# EAGLE board CT_schematic (EAGLE 7.6.0)

Size 100 x 80 mm. Coordinates in mm from the lower left corner, seen from the top.
Outline: 0,0 100,0 100,80 0,80 0,0
Copper layers (1*16): Top 0.035mm / dielectric 1.5mm / Bottom 0.035mm
Design rules "default": minimum track width 10mil, minimum drill 24mil, track to track 8mil, track to pad 8mil, pad to pad 8mil, via to via 8mil, smd to smd 8mil, copper to edge 40mil, drill to drill 8mil, minimum pad ring 10mil, minimum via ring 8mil, stop-mask expansion 4mil, vias tented up to drill 0mil, thermal gap 10mil

## Footprints (pad centres in the part's own frame; a part is rotated, then mirrored left to right if it is on the bottom)
C0603 = smd 0.8 x 0.8: 1 -0.762,0; 2 0.762,0
C0402 = smd 0.5 x 0.5: 1 -0.508,0; 2 0.508,0
C0805 = smd 1.2 x 1.3: 1 -1.016,0; 2 1.016,0
EXV-9B = smd 2.718 x 1.778: 1 -2.108,0; 2 2.108,0
C1210 = smd 1.2 x 2.5: 1 -1.524,0; 2 1.524,0
R0603 = smd 0.8 x 0.8: 1 -0.762,0; 2 0.762,0
EXV-9H = smd 3.505 x 1.676: 1 -2.857,0; 2 2.857,0
L0603 = smd 0.8 x 0.8: 1 -0.762,0; 2 0.762,0
IND25X25CZ = smd 2.489 x 3.429: 1 -2.718,0; 2 2.718,0
PJ-037B_PACKAGE = drill 3.7 square: 1 12,0 | drill 3.2 square: 2 6,0
UFQFPN48 = smd 0.559 x 0.305: 1 -3.375,2.751; 2 -3.375,2.251; 3 -3.375,1.75; 4 -3.375,1.25; 5 -3.375,0.75; 6 -3.375,0.25; 7 -3.375,-0.25; 8 -3.375,-0.75; 9 -3.375,-1.25; 10 -3.375,-1.75; 11 -3.375,-2.251; 12 -3.375,-2.751; 25 3.375,-2.751; 26 3.375,-2.251; 27 3.375,-1.75; 28 3.375,-1.25; 29 3.375,-0.75; 30 3.375,-0.25; 31 3.375,0.25; 32 3.375,0.75; 33 3.375,1.25; 34 3.375,1.75; 35 3.375,2.251; 36 3.375,2.751 | smd 0.305 x 0.559: 13 -2.751,-3.375; 14 -2.251,-3.375; 15 -1.75,-3.375; 16 -1.25,-3.375; 17 -0.75,-3.375; 18 -0.25,-3.375; 19 0.25,-3.375; 20 0.75,-3.375; 21 1.25,-3.375; 22 1.75,-3.375; 23 2.251,-3.375; 24 2.751,-3.375; 37 2.751,3.375; 38 2.251,3.375; 39 1.75,3.375; 40 1.25,3.375; 41 0.75,3.375; 42 0.25,3.375; 43 -0.25,3.375; 44 -0.75,3.375; 45 -1.25,3.375; 46 -1.75,3.375; 47 -2.251,3.375; 48 -2.751,3.375 | smd 5.588 x 5.588: 49 0,0
SOT-23-6 = smd 1.1 x 0.6: 1 -1.4,0.95; 2 -1.4,0; 3 -1.4,-0.95; 4 1.4,-0.95; 5 1.4,0; 6 1.4,0.95
SAMTEC_FTSH-105-01-L-DV-K = smd 0.762 x 2.794: 1 -2.54,-2.032; 2 -2.54,2.032; 3 -1.27,-2.032; 4 -1.27,2.032; 5 0,-2.032; 6 0,2.032; 7 1.27,-2.032; 8 1.27,2.032; 9 2.54,-2.032; 10 2.54,2.032
SOIC-8 = smd 1.6 x 0.6: 1 -2.7,1.905 | smd 1.55 x 0.6: 2 -2.7,0.635; 3 -2.7,-0.635; 4 -2.7,-1.905; 5 2.7,-1.905; 6 2.7,-0.635; 7 2.7,0.635; 8 2.7,1.905
182-009-MALE = drill 1.194 pad 1.524 octagon: 1 -5.537,10.923; 2 -2.769,10.923; 3 0,10.923; 4 2.769,10.923; 5 5.537,10.923; 6 -4.153,8.08; 7 -1.384,8.08; 8 1.384,8.08; 9 4.153,8.08 | hole 3.048: -12.446,9.501; 12.446,9.501
USB-A-H = drill 0.914: 1 2.718,3.493; 2 2.718,1.003; 3 2.718,-1.003; 4 2.718,-3.493 | drill 2.311: 5 0,-6.566; 6 0,6.566
SOT143B = smd 1 x 0.7: 1 -0.75,-1 | smd 0.6 x 0.7: 2 0.95,-1; 3 0.95,1; 4 -0.95,1
XB24CZ7UIS-004 = smd 2.84 x 1.52: 1 -10,6; 2 -10,4; 3 -10,2; 4 -10,0; 5 -10,-2; 6 -10,-4; 7 -10,-6; 8 -10,-8; 9 -10,-10; 10 -10,-12; 11 -10,-14; 12 -10,-16; 13 -10,-18; 21 10,-18; 22 10,-16; 23 10,-14; 24 10,-12; 25 10,-10; 26 10,-8; 27 10,-6; 28 10,-4; 29 10,-2; 30 10,0; 31 10,2; 32 10,4; 33 10,6; 34 10,8; 35 10,10; 36 10,12; 37 10,14 | smd 1.52 x 2.84: 14 -6,-19.68; 15 -4,-19.68; 16 -2,-19.68; 17 0,-19.68; 18 2,-19.68; 19 4,-19.68; 20 6,-19.68
ABS07-32.768KHZ-7-T = smd 1.1 x 2.4: 1 -2.5,0; 2 0,0
ASFL1 = smd 1.7 x 1.5: 1 -1.27,-1.1; 2 1.27,-1.1; 3 1.27,1.1; 4 -1.27,1.1
LP2954 = smd 1.6 x 0.6: 1 -2.475,1.905 | smd 1.55 x 0.6: 2 -2.475,0.635; 3 -2.475,-0.635; 4 -2.475,-1.905; 5 2.475,-1.905; 6 2.475,-0.635; 7 2.475,0.635; 8 2.475,1.905
IR3899MTR1PBF = smd 0.25 x 0.75: 1 0,0; 2 0.5,0; 3 1,0; 4 1.5,0; 5 2,0; 6 2.5,0; 7 3,0 | smd 0.75 x 0.25: 8 3.425,0.78; 9 3.425,1.28; 10 3.425,1.78; 14 -0.425,1.78; 15 -0.425,1.28; 16 -0.425,0.78 | smd 0.3 x 1.95: 11 3.22,3.63 | smd 1.62 x 2.42: 12 1.786,3.8 | smd 1 x 1.95: 13 0.117,3.63 | smd 2.19 x 1.25: 17 1.51,1.26
SON-6 = smd 0.55 x 0.3: 1 -0.355,0.5 | smd 0.52 x 0.3: 2 -0.37,0; 3 -0.37,-0.5; 4 0.37,-0.5; 5 0.37,0; 6 0.37,0.5
SW_4-1437565-2 = smd 1.4 x 2.1: 1 -2.23,4.55; 2 -2.23,-4.55; 3 2.23,4.55; 4 2.23,-4.55
LGM67K-G1J2-24-Z = smd 0.8 x 1.4: A -2,0; C 0,0
NC7SZ125M5X = smd 1.3 x 0.7: 1 -1.3,0.95; 2 -1.3,0; 3 -1.3,-0.95; 4 1.3,-0.95; 5 1.3,0.95

## Placement (x,y rotation side)
C1  1e-06  [C0603]  -34.29,107.95 0 top  (outside the outline)
C2  1e-07  [C0603]  -38.1,107.95 0 top  (outside the outline)
C3  1e-07  [C0603]  -41.91,107.95 0 top  (outside the outline)
C4  1e-07  [C0603]  -45.72,107.95 0 top  (outside the outline)
C5  1e-07  [C0603]  -49.53,107.95 0 top  (outside the outline)
C6  1e-07  [C0603]  -53.34,107.95 0 top  (outside the outline)
C7  4.7e-06  [C0603]  -19.05,107.95 0 top  (outside the outline)
C8  2.2e-06  [C0603]  -22.86,107.95 0 top  (outside the outline)
C9  1e-08  [C0603]  -57.15,107.95 0 top  (outside the outline)
C10  1e-06  [C0603]  -60.96,107.95 0 top  (outside the outline)
C11  1e-11  [C0402]  -46.99,113.03 0 top  (outside the outline)
C12  1e-11  [C0402]  -50.8,113.03 0 top  (outside the outline)
C13  1e-07  [C0402]  -54.61,113.03 0 top  (outside the outline)
C14  1e-06  [C0603]  -64.77,107.95 0 top  (outside the outline)
C15  1e-06  [C0603]  -68.58,107.95 0 top  (outside the outline)
C16  1e-07  [C0402]  -58.42,113.03 0 top  (outside the outline)
C17  1e-05  [C0805]  -34.29,96.52 0 top  (outside the outline)
C18  1e-07  [C0402]  -62.23,113.03 0 top  (outside the outline)
C19  4.7e-11  [C0402]  -43.18,113.03 0 top  (outside the outline)
C20  8.2e-12  [C0603]  -26.67,107.95 0 top  (outside the outline)
C21  1e-08  [C0402]  -66.04,113.03 0 top  (outside the outline)
C22  1e-06  [EXV-9B]  -74.93,88.9 0 top  (outside the outline)
C23  2.2e-06  [EXV-9B]  -83.82,88.9 0 top  (outside the outline)
C24  0.0001  [C1210]  -67.31,88.9 0 top  (outside the outline)
C25  2.2e-06  [C0603]  -30.48,107.95 0 top  (outside the outline)
C26  1e-07  [C0402]  -69.85,113.03 0 top  (outside the outline)
C27  1e-07  [C0402]  -73.66,113.03 0 top  (outside the outline)
C28  8.6971073877236e-09  [R0603]  -44.45,96.52 0 top  (outside the outline)
C29  2.9649229730876e-07  [R0603]  -54.61,96.52 0 top  (outside the outline)
C32  1e-07  [C0402]  -77.47,113.03 0 top  (outside the outline)
C33  0.0001  [EXV-9H]  -90.17,81.28 0 top  (outside the outline)
C34  0.0001  [EXV-9H]  -17.78,90.17 0 top  (outside the outline)
C35  1e-08  [C0402]  -81.28,113.03 0 top  (outside the outline)
C36  1e-08  [C0402]  -85.09,113.03 0 top  (outside the outline)
C37  1e-08  [C0402]  -88.9,113.03 0 top  (outside the outline)
F1  240.0  [L0603]  -72.39,107.95 0 top  (outside the outline)
I1  6.8e-07  [IND25X25CZ]  -27.94,90.17 0 top  (outside the outline)
J1  PJ-037B  [PJ-037B_PACKAGE]  -57.15,68.58 0 top  (outside the outline)
R1  10000.0  [R0603]  -35.56,102.87 0 top  (outside the outline)
R2  1000.0  [R0603]  -76.2,107.95 0 top  (outside the outline)
R3  1600.5  [R0603]  -80.01,107.95 0 top  (outside the outline)
R4  4700.0  [R0603]  -83.82,107.95 0 top  (outside the outline)
R5  4700.0  [R0603]  -87.63,107.95 0 top  (outside the outline)
R6  47000.0  [R0603]  -40.64,102.87 0 top  (outside the outline)
R7  10000.0  [R0603]  -45.72,102.87 0 top  (outside the outline)
R8  1270.0  [R0603]  -91.44,107.95 0 top  (outside the outline)
R9  10000.0  [R0603]  -50.8,102.87 0 top  (outside the outline)
R10  10000.0  [R0603]  -55.88,102.87 0 top  (outside the outline)
R11  10000.0  [R0603]  -60.96,102.87 0 top  (outside the outline)
R12  10000.0  [R0603]  -66.04,102.87 0 top  (outside the outline)
R13  10000.0  [R0603]  -71.12,102.87 0 top  (outside the outline)
R14  10000.0  [R0603]  -76.2,102.87 0 top  (outside the outline)
R15  5.0  [R0603]  -15.24,113.03 0 top  (outside the outline)
R16  120.0  [R0603]  -19.05,113.03 0 top  (outside the outline)
R17  120.0  [R0603]  -22.86,113.03 0 top  (outside the outline)
R18  470000.0  [R0603]  -87.63,96.52 0 top  (outside the outline)
R19  100000.0  [R0603]  -92.71,96.52 0 top  (outside the outline)
R20  100000.0  [R0603]  -15.24,102.87 0 top  (outside the outline)
R21  164658.62  [R0603]  -82.55,96.52 0 top  (outside the outline)
R22  100000.0  [R0603]  -20.32,102.87 0 top  (outside the outline)
R23  0.1  [R0603]  -26.67,113.03 0 top  (outside the outline)
R24  4030.2416170974  [R0603]  -62.23,96.52 0 top  (outside the outline)
R25  453.0  [R0603]  -30.48,113.03 0 top  (outside the outline)
R26  58.613333333333  [R0603]  -69.85,96.52 0 top  (outside the outline)
R27  130.0  [R0603]  -34.29,113.03 0 top  (outside the outline)
R28  39000.0  [R0603]  -81.28,102.87 0 top  (outside the outline)
R29  49900.0  [R0603]  -86.36,102.87 0 top  (outside the outline)
R30  5147.5789473684  [R0603]  -77.47,96.52 0 top  (outside the outline)
R31  10000.0  [R0603]  -91.44,102.87 0 top  (outside the outline)
R32  10000.0  [R0603]  -15.24,107.95 0 top  (outside the outline)
R33  9100.0  [R0603]  -38.1,113.03 0 top  (outside the outline)
R34  680000.0  [R0603]  -25.4,102.87 0 top  (outside the outline)
R35  120000.0  [R0603]  -30.48,102.87 0 top  (outside the outline)
U1  STM32F412CEU6  [UFQFPN48]  -62.23,81.28 0 top  (outside the outline)
U2  MAX4995AAUT+T  [SOT-23-6]  -91.44,87.63 0 top  (outside the outline)
U3  FTSH-105-01-L-DV-K  [SAMTEC_FTSH-105-01-L-DV-K]  -35.56,69.85 0 top  (outside the outline)
U4  MCP2562-E/SN  [SOIC-8]  -39.37,81.28 0 top  (outside the outline)
U5  182-009-113R531  [182-009-MALE]  -62.23,6.35 0 top  (outside the outline)
U6  SN65HVD230D  [SOIC-8]  -53.34,81.28 0 top  (outside the outline)
U7  182-009-113R531  [182-009-MALE]  -36.83,45.72 0 top  (outside the outline)
U8  61400416021  [USB-A-H]  -59.69,48.26 0 top  (outside the outline)
U9  prtr5v0u2ax  [SOT143B]  -24.13,118.11 0 top  (outside the outline)
U10  XB24CZ7UIS-004  [XB24CZ7UIS-004]  -25.4,21.59 0 top  (outside the outline)
U11  ABS07-32.768KHZ-7-T  [ABS07-32.768KHZ-7-T]  -46.99,90.17 0 top  (outside the outline)
U12  ASFL1-25MHZ-NCS  [ASFL1]  -81.28,81.28 0 top  (outside the outline)
U13  LP2954AIMX/NOPB  [LP2954]  -25.4,81.28 0 top  (outside the outline)
U14  IR3899MTR1PBF  [IR3899MTR1PBF]  -90.17,64.77 0 top  (outside the outline)
U15  TPS3895ADRYR  [SON-6]  -27.94,116.84 0 top  (outside the outline)
U16  4-1437565-2  [SW_4-1437565-2]  -73.66,67.31 0 top  (outside the outline)
U17  Q65110A2395  [LGM67K-G1J2-24-Z]  -55.88,88.9 0 top  (outside the outline)
U18  nc7sz125m5x  [NC7SZ125M5X]  -15.24,96.52 0 top  (outside the outline)
U19  nc7sz125m5x  [NC7SZ125M5X]  -21.59,96.52 0 top  (outside the outline)
U20  nc7sz125m5x  [NC7SZ125M5X]  -27.94,96.52 0 top  (outside the outline)

## Library data of the parts
C1-C29 C32-C37 F1 I1 J1 R1-R35 U1-U20 = circuit_tree

## Nets
CLK_CRYSTAL_U1_3: C11.1 U1.3 U11.1
CLK_CRYSTAL_U1_4: C12.1 U1.4 U11.2
CLK_U1_5: U1.5 U12.3
GND: C1.2 C2.2 C3.2 C4.2 C5.2 C6.2 C7.2 C8.2 C9.2 C10.2 C11.2 C12.2 C13.2 C14.2 C15.2 C16.2 C17.2 C18.2 C19.2 C20.2 C21.2 C22.2 C23.2 C25.2 C26.2 C27.2 C32.2 C33.2 C34.2 C35.2 C36.2 C37.2 J1.2 R2.2 R6.2 R7.2 R8.2 R10.2 R14.2 R15.2 R18.2 R22.2 R23.1 R23.2 R25.2 R28.2 R30.2 R33.2 R35.2 U1.8 U1.23 U1.35 U1.47 U1.49 U2.2 U3.3 U3.5 U4.2 U4.8 U5.5 U6.2 U7.5 U8.4 U8.5 U8.6 U9.1 U10.1 U10.11 U10.13 U10.22 U10.35 U12.2 U13.4 U14.4 U14.11 U14.17 U15.2 U17.C U18.2 U18.3 U19.1 U19.3 U20.1 U20.3
NET_U1_7: R5.1 U1.7 U20.4
NET_U1_9: C9.1 C10.1 F1.1 U1.9
NET_U1_22: C8.1 U1.22
NET_U1_31: R8.1 U1.31
NET_U1_42: R3.1 U1.42 U17.A
NET_U1_43: R1.1 U1.43 U16.3 U16.4
NET_U1_44: R7.1 U1.44
NET_U2_3: R6.1 U2.3
NET_U3_9: R15.1 U3.9
NET_U4_6: R16.2 U4.6
NET_U5_2: R16.2 U4.6 U5.2
NET_U5_3: R16.1 U4.7 U5.3
NET_U6_6: R17.2 U6.6
NET_U6_8: R18.1 U6.8
NET_U7_2: R17.2 U6.6 U7.2
NET_U7_3: R17.1 U6.7 U7.3
NET_U10_6: R4.1 U10.6 U19.4
NET_U13_3: R20.1 U13.3
NET_U13_5: R19.1 U13.5
NET_U13_7: R21.2 R22.1 U13.7
NET_U14_1: C28.1 R24.1 R25.1 R26.1 R27.1 U14.1 U14.8
NET_U14_2: C27.1 U14.2
NET_U14_3: C28.2 C29.1 C29.2 U14.3
NET_U14_5: R28.1 U14.5
NET_U14_10: C25.1 U14.10
NET_U14_12: C24.1 I1.1 U14.12
NET_U14_13: U14.13
NET_U14_14: C24.2 U14.14
NET_U14_15: R29.1 R30.1 U14.15
NET_U14_ATNET_3: I1.2 R24.2
NET_U14_ATNET_4: C29.2 R26.2
NET_U14_ATNET_5: R27.2
NET_U15_1: R32.1 R33.1 U15.1
NET_U15_3: R34.2 R35.1 U15.3
NET_U15_4: R31.1 U15.4 U18.4 U19.2 U20.2
NET_U16_1: R2.1 U16.1 U16.2
PROC_CAN1_RX: U1.45 U6.4
PROC_CAN1_TX: U1.46 U6.1
PROC_CAN2_RX: U1.25 U4.4
PROC_CAN2_TX: U1.26 U4.1
PROC_GPIO_TO_U1_USB_FAULT: R9.1 U1.6 U2.6
PROC_GPIO_TO_U1_VBUS_EN: R10.1 U1.2 U2.4
PROC_SPI1_MISO: U1.16 U10.17
PROC_SPI1_MOSI: U1.17 U10.16
PROC_SPI1_NSS: U1.14 U10.15
PROC_SPI1_SCK: U1.15 U10.14
PROC_SYS_JTCK_SWCLK: R14.1 U1.37 U3.4
PROC_SYS_JTDI: R12.1 U1.38 U3.8
PROC_SYS_JTDO_SWO: U1.39 U3.6
PROC_SYS_JTMS_SWDIO: R13.1 U1.34 U3.2
PROC_USB_OTG_FS_DM: U1.32 U8.2 U9.3
PROC_USB_OTG_FS_DP: U1.33 U8.3 U9.2
PROC_USB_OTG_FS_VBUS: U1.30 U2.1 U8.1 U9.4
RST_OUT_U3_JTAG_RST_B: R11.1 U3.10 U18.1
VCC_S1_16V8: C22.1 C26.1 C33.1 C34.1 J1.1 R20.2 R29.2 U13.8 U14.9
VCC_TIER1_3V3: C1.1 C2.1 C3.1 C4.1 C5.1 C6.1 C7.1 C13.1 C15.1 C16.1 C17.1 C18.1 C19.1 C20.1 C21.1 C23.1 C32.1 C35.1 C36.1 C37.1 F1.2 R1.2 R3.2 R4.2 R5.2 R9.2 R11.2 R12.2 R13.2 R19.2 R21.1 R31.2 R32.2 R34.1 U1.1 U1.24 U1.36 U1.48 U3.1 U4.5 U6.3 U10.2 U10.27 U12.4 U13.1 U15.6 U18.5 U19.5 U20.5
VCC_TIER1_5V0: C14.1 I1.2 R24.2 U2.5 U4.3

## Tracks (layer width: path | path; a pad name or v marks a point on that pad's centre or on a via)
CLK_CRYSTAL_U1_3  (2 unrouted)
CLK_CRYSTAL_U1_4  (2 unrouted)
CLK_U1_5  (1 unrouted)
GND  (83 unrouted)
NET_U1_7  (2 unrouted)
NET_U1_9  (3 unrouted)
NET_U1_22  (1 unrouted)
NET_U1_31  (1 unrouted)
NET_U1_42  (2 unrouted)
NET_U1_43  (3 unrouted)
NET_U1_44  (1 unrouted)
NET_U2_3  (1 unrouted)
NET_U3_9  (1 unrouted)
NET_U4_6  (1 unrouted)
NET_U5_2  (2 unrouted)
NET_U5_3  (2 unrouted)
NET_U6_6  (1 unrouted)
NET_U6_8  (1 unrouted)
NET_U7_2  (2 unrouted)
NET_U7_3  (2 unrouted)
NET_U10_6  (2 unrouted)
NET_U13_3  (1 unrouted)
NET_U13_5  (1 unrouted)
NET_U13_7  (2 unrouted)
NET_U14_1  (6 unrouted)
NET_U14_2  (1 unrouted)
NET_U14_3  (3 unrouted)
NET_U14_5  (1 unrouted)
NET_U14_10  (1 unrouted)
NET_U14_12  (2 unrouted)
NET_U14_14  (1 unrouted)
NET_U14_15  (2 unrouted)
NET_U14_ATNET_3  (1 unrouted)
NET_U14_ATNET_4  (1 unrouted)
NET_U15_1  (2 unrouted)
NET_U15_3  (2 unrouted)
NET_U15_4  (4 unrouted)
NET_U16_1  (2 unrouted)
PROC_CAN1_RX  (1 unrouted)
PROC_CAN1_TX  (1 unrouted)
PROC_CAN2_RX  (1 unrouted)
PROC_CAN2_TX  (1 unrouted)
PROC_GPIO_TO_U1_USB_FAULT  (2 unrouted)
PROC_GPIO_TO_U1_VBUS_EN  (2 unrouted)
PROC_SPI1_MISO  (1 unrouted)
PROC_SPI1_MOSI  (1 unrouted)
PROC_SPI1_NSS  (1 unrouted)
PROC_SPI1_SCK  (1 unrouted)
PROC_SYS_JTCK_SWCLK  (2 unrouted)
PROC_SYS_JTDI  (2 unrouted)
PROC_SYS_JTDO_SWO  (1 unrouted)
PROC_SYS_JTMS_SWDIO  (2 unrouted)
PROC_USB_OTG_FS_DM  (2 unrouted)
PROC_USB_OTG_FS_DP  (2 unrouted)
PROC_USB_OTG_FS_VBUS  (3 unrouted)
RST_OUT_U3_JTAG_RST_B  (2 unrouted)
VCC_S1_16V8  (8 unrouted)
VCC_TIER1_3V3  (48 unrouted)
VCC_TIER1_5V0  (4 unrouted)